# EAGLE board A6ECU-5 (EAGLE 7.5.0)
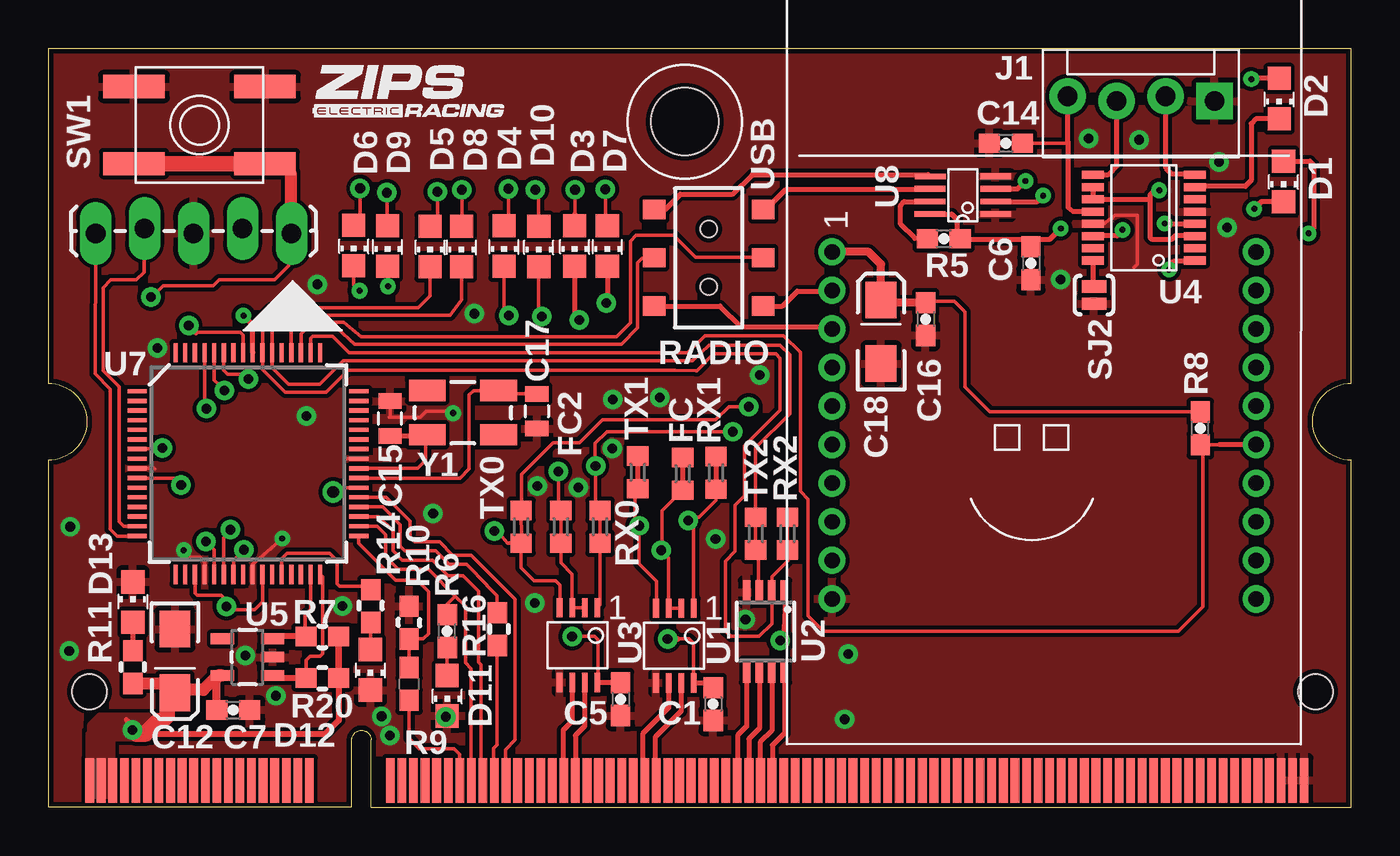
[diagram p0: board, top side]
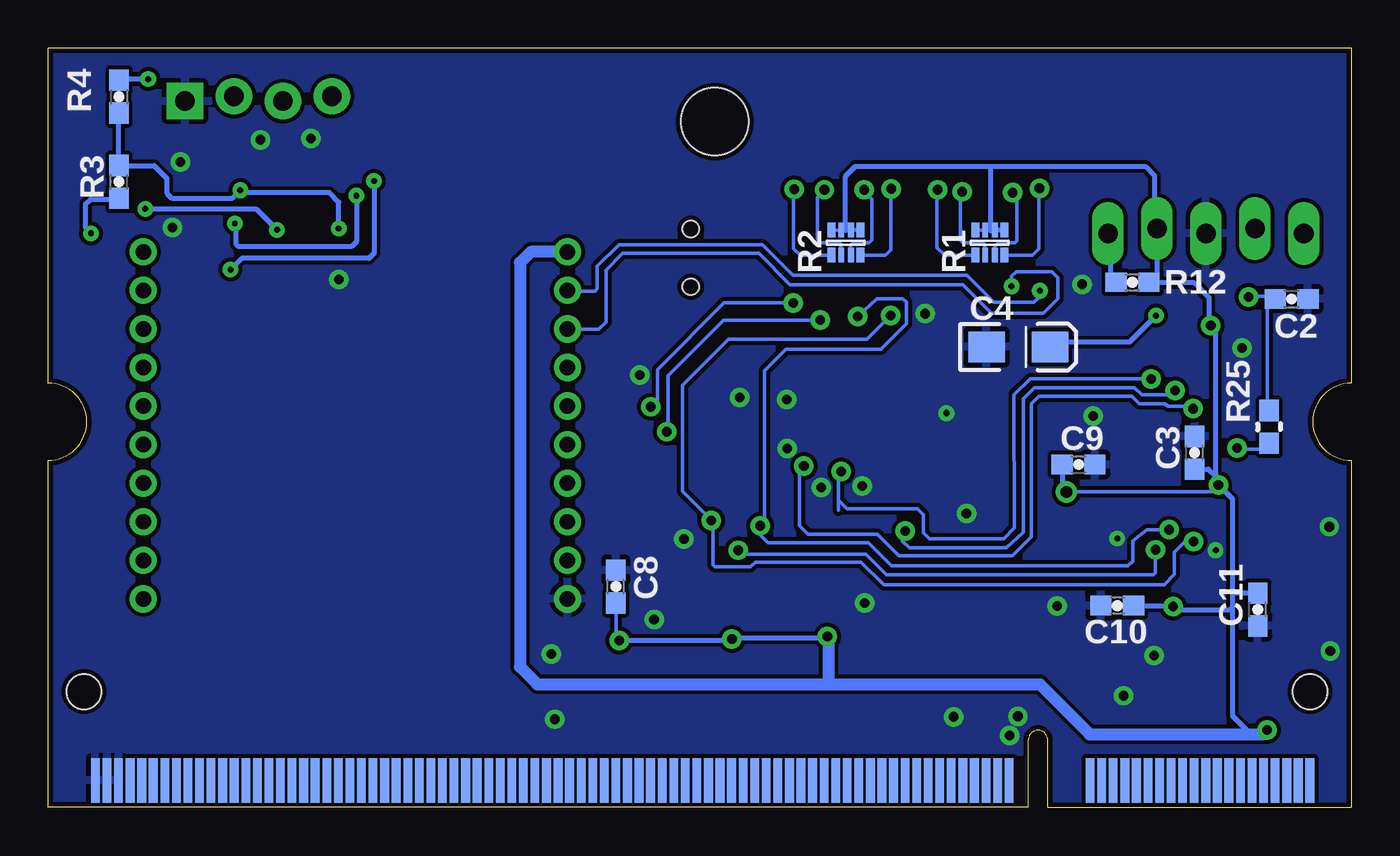
[diagram p1: board, bottom side, seen from below]

Size 67.6 x 39.37 mm. Coordinates in mm from the lower left corner, seen from the top.
Copper layers (1*16): Top 0.035mm / dielectric 1.5mm / Bottom 0.035mm
Design rules "SparkFun": minimum track width 8mil, minimum drill 20mil, track to track 8mil, track to pad 8mil, pad to pad 8mil, via to via 8mil, smd to smd 8mil, copper to edge 10mil, drill to drill 8mil, minimum pad ring 12mil, minimum via ring 10mil, stop-mask expansion 4mil, vias tented up to drill 25mil, thermal gap 10mil

## Footprints (pad centres in the part's own frame; a part is rotated, then mirrored left to right if it is on the bottom)
0603 = smd 1.1 x 1: 1 -0.85,0; 2 0.85,0
EIA3216-16V = smd 1.9 x 1.6: A 1.65,0; C -1.65,0
0805 = smd 0.8 x 1.2: 1 -0.9,0; 2 0.9,0
CHIP_LED0805 = smd 1.2 x 1.2: A 0,-1.05; C 0,1.05
R0603 = smd 1 x 1.1: 1 -0.85,0; 2 0.85,0
1X05_LOCK_LONGPADS = drill 1.016 long: 1 0,0; 2 2.54,-0.254; 3 5.08,0; 4 7.62,-0.254; 5 10.16,0
MOLEX_1X4 = drill 1.016 pad 1.88 square: 1 -3.81,0.127 | drill 1.016 pad 1.88: 2 -1.27,-0.127; 3 1.27,0.127; 4 3.81,-0.127
MNR14 = smd 0.4 x 0.75: 1 -0.75,-0.65; 4 0.75,-0.65; 5 0.75,0.65; 8 -0.75,0.65 | smd 0.3 x 0.75: 2 -0.25,-0.65; 3 0.25,-0.65; 6 0.25,0.65; 7 -0.25,0.65
AYZ0202 = smd 1 x 1.15: 1 -2.5,2.825; 2 0,2.825; 3 2.5,2.825; 4 -2.5,-2.825; 5 0,-2.825; 6 2.5,-2.825 | hole 0.85: 1.5,0; -1.5,0
PAD-JUMPER-2-NO_YES_SILK = smd 0.635 x 1.27: 1 -0.45,0; 2 0.45,0
EVQ-Q2 = smd 3.2 x 1.2: A -3.4,-2; A' 3.4,-2; B -3.4,2; B' 3.4,2
MSOP-8 = smd 0.3 x 1: 1 -0.975,-1.95; 2 -0.325,-1.95; 3 0.325,-1.95; 4 0.975,-1.95; 5 0.975,1.925; 6 0.325,1.925; 7 -0.325,1.925; 8 -0.975,1.925
MSOP8 = smd 0.4 x 1.2: 1 -0.975,-2.05; 2 -0.325,-2.05; 3 0.325,-2.05; 4 0.975,-2.05; 5 0.975,2.05; 6 0.325,2.05; 7 -0.325,2.05; 8 -0.975,2.05
SSOP-16 = smd 0.419 x 1.143: 1 -2.223,-2.642; 2 -1.587,-2.642; 3 -0.953,-2.642; 4 -0.318,-2.642; 5 0.318,-2.642; 6 0.953,-2.642; 7 1.587,-2.642; 8 2.223,-2.642; 9 2.223,2.642; 10 1.587,2.642; 11 0.953,2.642; 12 0.318,2.642; 13 -0.318,2.642; 14 -0.953,2.642; 15 -1.587,2.642; 16 -2.223,2.642
SOT23-5 = smd 0.55 x 1.2: 1 -0.95,-1.3; 2 0,-1.3; 3 0.95,-1.3; 4 0.95,1.3; 5 -0.95,1.3
RM024-TH = drill 0.8: 1 9,11; 2 7,11; 3 5,11; 4 3,11; 5 1,11; 6 -1,11; 7 -3,11; 8 -5,11; 9 -7,11; 10 -9,11; 11 -9,-11; 12 -7,-11; 13 -5,-11; 14 -3,-11; 15 -1,-11; 16 1,-11; 17 3,-11; 18 5,-11; 19 7,-11; 20 9,-11
TQFP-64 = smd 0.22 x 1: 1 -3.75,-5.75; 2 -3.25,-5.75; 3 -2.75,-5.75; 4 -2.25,-5.75; 5 -1.75,-5.75; 6 -1.25,-5.75; 7 -0.75,-5.75; 8 -0.25,-5.75; 9 0.25,-5.75; 10 0.75,-5.75; 11 1.25,-5.75; 12 1.75,-5.75; 13 2.25,-5.75; 14 2.75,-5.75; 15 3.25,-5.75; 16 3.75,-5.75; 33 3.75,5.75; 34 3.25,5.75; 35 2.75,5.75; 36 2.25,5.75; 37 1.75,5.75; 38 1.25,5.75; 39 0.75,5.75; 40 0.25,5.75; 41 -0.25,5.75; 42 -0.75,5.75; 43 -1.25,5.75; 44 -1.75,5.75; 45 -2.25,5.75; 46 -2.75,5.75; 47 -3.25,5.75; 48 -3.75,5.75 | smd 1 x 0.22: 17 5.75,-3.75; 18 5.75,-3.25; 19 5.75,-2.75; 20 5.75,-2.25; 21 5.75,-1.75; 22 5.75,-1.25; 23 5.75,-0.75; 24 5.75,-0.25; 25 5.75,0.25; 26 5.75,0.75; 27 5.75,1.25; 28 5.75,1.75; 29 5.75,2.25; 30 5.75,2.75; 31 5.75,3.25; 32 5.75,3.75; 49 -5.75,3.75; 50 -5.75,3.25; 51 -5.75,2.75; 52 -5.75,2.25; 53 -5.75,1.75; 54 -5.75,1.25; 55 -5.75,0.75; 56 -5.75,0.25; 57 -5.75,-0.25; 58 -5.75,-0.75; 59 -5.75,-1.25; 60 -5.75,-1.75; 61 -5.75,-2.25; 62 -5.75,-2.75; 63 -5.75,-3.25; 64 -5.75,-3.75
VFSOP-8 = smd 0.3 x 1.6: 1 -0.98,-1.7; 2 -0.33,-1.7; 3 0.33,-1.7; 4 0.98,-1.7; 5 0.97,1.69; 6 0.325,1.7; 7 -0.33,1.7; 8 -0.98,1.71
SLOT-1376408-1_1.8V = smd 0.45 x 2.3: 1 2.15,1.4; 3 2.75,1.4; 5 3.35,1.4; 7 3.95,1.4; 9 4.55,1.4; 11 5.15,1.4; 13 5.75,1.4; 15 6.35,1.4; 17 6.95,1.4; 19 7.55,1.4; 21 8.15,1.4; 23 8.75,1.4; 25 9.35,1.4; 27 9.95,1.4; 29 10.55,1.4; 31 11.15,1.4; 33 11.75,1.4; 35 12.35,1.4; 37 12.95,1.4; 39 13.55,1.4; 41 17.75,1.4; 43 18.35,1.4; 45 18.95,1.4; 47 19.55,1.4; 49 20.15,1.4; 51 20.75,1.4; 53 21.35,1.4; 55 21.95,1.4; 57 22.55,1.4; 59 23.15,1.4; 61 23.75,1.4; 63 24.35,1.4; 65 24.95,1.4; 67 25.55,1.4; 69 26.15,1.4; 71 26.75,1.4; 73 27.35,1.4; 75 27.95,1.4; 77 28.55,1.4; 79 29.15,1.4; 81 29.75,1.4; 83 30.35,1.4; 85 30.95,1.4; 87 31.55,1.4; 89 32.15,1.4; 91 32.75,1.4; 93 33.35,1.4; 95 33.95,1.4; 97 34.55,1.4; 99 35.15,1.4; 101 35.75,1.4; 103 36.35,1.4; 105 36.95,1.4; 107 37.55,1.4; 109 38.15,1.4; 111 38.75,1.4; 113 39.35,1.4; 115 39.95,1.4; 117 40.55,1.4; 119 41.15,1.4; 121 41.75,1.4; 123 42.35,1.4; 125 42.95,1.4; 127 43.55,1.4; 129 44.15,1.4; 131 44.75,1.4; 133 45.35,1.4; 135 45.95,1.4; 137 46.55,1.4; 139 47.15,1.4; 141 47.75,1.4; 143 48.35,1.4; 145 48.95,1.4; 147 49.55,1.4; 149 50.15,1.4; 151 50.75,1.4; 153 51.35,1.4; 155 51.95,1.4; 157 52.55,1.4; 159 53.15,1.4; 161 53.75,1.4; 163 54.35,1.4; 165 54.95,1.4; 167 55.55,1.4; 169 56.15,1.4; 171 56.75,1.4; 173 57.35,1.4; 175 57.95,1.4; 177 58.55,1.4; 179 59.15,1.4; 181 59.75,1.4; 183 60.35,1.4; 185 60.95,1.4; 187 61.55,1.4; 189 62.15,1.4; 191 62.75,1.4; 193 63.35,1.4; 195 63.95,1.4; 197 64.55,1.4; 199 65.15,1.4 | smd 0.45 x 2.3 bottom: 2 2.15,1.4; 4 2.75,1.4; 6 3.35,1.4; 8 3.95,1.4; 10 4.55,1.4; 12 5.15,1.4; 14 5.75,1.4; 16 6.35,1.4; 18 6.95,1.4; 20 7.55,1.4; 22 8.15,1.4; 24 8.75,1.4; 26 9.35,1.4; 28 9.95,1.4; 30 10.55,1.4; 32 11.15,1.4; 34 11.75,1.4; 36 12.35,1.4; 38 12.95,1.4; 40 13.55,1.4; 42 17.75,1.4; 44 18.35,1.4; 46 18.95,1.4; 48 19.55,1.4; 50 20.15,1.4; 52 20.75,1.4; 54 21.35,1.4; 56 21.95,1.4; 58 22.55,1.4; 60 23.15,1.4; 62 23.75,1.4; 64 24.35,1.4; 66 24.95,1.4; 68 25.55,1.4; 70 26.15,1.4; 72 26.75,1.4; 74 27.35,1.4; 76 27.95,1.4; 78 28.55,1.4; 80 29.15,1.4; 82 29.75,1.4; 84 30.35,1.4; 86 30.95,1.4; 88 31.55,1.4; 90 32.15,1.4; 92 32.75,1.4; 94 33.35,1.4; 96 33.95,1.4; 98 34.55,1.4; 100 35.15,1.4; 102 35.75,1.4; 104 36.35,1.4; 106 36.95,1.4; 108 37.55,1.4; 110 38.15,1.4; 112 38.75,1.4; 114 39.35,1.4; 116 39.95,1.4; 118 40.55,1.4; 120 41.15,1.4; 122 41.75,1.4; 124 42.35,1.4; 126 42.95,1.4; 128 43.55,1.4; 130 44.15,1.4; 132 44.75,1.4; 134 45.35,1.4; 136 45.95,1.4; 138 46.55,1.4; 140 47.15,1.4; 142 47.75,1.4; 144 48.35,1.4; 146 48.95,1.4; 148 49.55,1.4; 150 50.15,1.4; 152 50.75,1.4; 154 51.35,1.4; 156 51.95,1.4; 158 52.55,1.4; 160 53.15,1.4; 162 53.75,1.4; 164 54.35,1.4; 166 54.95,1.4; 168 55.55,1.4; 170 56.15,1.4; 172 56.75,1.4; 174 57.35,1.4; 176 57.95,1.4; 178 58.55,1.4; 180 59.15,1.4; 182 59.75,1.4; 184 60.35,1.4; 186 60.95,1.4; 188 61.55,1.4; 190 62.15,1.4; 192 62.75,1.4; 194 63.35,1.4; 196 63.95,1.4; 198 64.55,1.4; 200 65.15,1.4 | hole 1.8: 2.15,6; 65.75,6 | hole 3.5: 33.02,35.56
CRYSTAL-SMD-5X3 = smd 1.9 x 1.1: 1 -1.85,-1.15; 2 1.85,-1.15; 3 1.85,1.15; 4 -1.85,1.15

## Placement (x,y rotation side)
C1  0.1UF  [0603]  34.49,5.36 270 top
C2  0.1UF  [0603]  3.1,26.37 0 bottom
C3  0.1UF  [0603]  8.13,18.39 90 bottom
C4  10UF  [EIA3216-16V]  17.27,23.88 0 bottom
C5  0.1UF  [0603]  29.69,5.61 270 top
C6  0.1UF  [0603]  50.98,28.22 270 top
C7  0.1UF  [0603]  9.6,5.05 0 top
C8  0.1UF  [0603]  38.15,11.46 90 bottom
C9  0.1UF  [0603]  14.15,17.78 0 bottom
C10  0.1UF  [0603]  12.14,10.46 180 bottom
C11  0.1UF  [0603]  4.85,10.26 90 bottom
C12  10UF  [EIA3216-16V]  6.58,7.59 270 top
C14  0.1UF  [0603]  49.68,34.44 180 top
C15  12PF  [0805]  17.73,20.17 90 top
C16  0.1UF  [0603]  45.52,25.32 270 top
C17  12PF  [0805]  25.35,20.55 270 top
C18  10UF  [EIA3216-16V]  43.21,24.66 90 top
D1  RED  [CHIP_LED0805]  64.08,32.46 180 top
D2  GREEN  [CHIP_LED0805]  63.86,36.75 180 top
D3  RED  [CHIP_LED0805]  27.3,29.11 180 top
D4  RED  [CHIP_LED0805]  23.65,29.11 180 top
D5  RED  [CHIP_LED0805]  19.81,29.08 180 top
D6  RED  [CHIP_LED0805]  15.85,29.13 180 top
D7  GREEN  [CHIP_LED0805]  29.01,29.11 180 top
D8  GREEN  [CHIP_LED0805]  21.44,29.08 180 top
D9  GREEN  [CHIP_LED0805]  17.6,29.11 180 top
D10  GREEN  [CHIP_LED0805]  25.45,29.08 180 top
D11  ORANGE  [CHIP_LED0805]  20.7,5.79 180 top
D12  AMBER  [CHIP_LED0805]  16.71,7.14 180 top
D13  GREEN  [CHIP_LED0805]  4.39,10.64 0 top
FC  TESTPOINT  [R0603]  32.92,17.3 90 top
FC2  TESTPOINT  [R0603]  26.59,14.55 90 top
ICSP  ICSP  [1X05_LOCK_LONGPADS]  12.62,29.77 180 top
J1  M4_1X4_LOCK  [MOLEX_1X4]  56.69,36.75 180 top
R1  RN-4_1K  [MNR14]  18.75,29.29 0 bottom
R2  RN-4_1K  [MNR14]  26.21,29.29 0 bottom
R3  1K  [0603]  63.93,32.44 90 bottom
R4  1K  [0603]  63.93,36.86 270 bottom
R5  1K  [0603]  46.46,29.49 0 top
R6  1K  [0603]  20.7,9.14 90 top
R7  2k  [0603]  14.22,8.86 0 top
R8  1K  [0603]  59.77,19.66 90 top
R9  30k  [0603]  18.72,6.4 270 top
R10  10k  [0603]  18.72,9.59 270 top
R11  499  [0603]  4.39,7.28 270 top
R12  10K  [0603]  11.35,27.23 0 bottom
R14  499  [0603]  16.74,10.44 90 top
R16  1k  [0603]  23.29,9.25 90 top
R20  2k  [0603]  14.22,6.71 0 top
R25  499  [0603]  4.27,19.74 270 bottom
RX0  TESTPOINT  [R0603]  28.63,14.55 90 top
RX1  TESTPOINT  [R0603]  34.65,17.35 90 top
RX2  TESTPOINT  [R0603]  38.35,14.2 90 top
S1  DPDT  [AYZ0202]  34.26,28.5 270 top
SJ2  [PAD-JUMPER-2-NO_YES_SILK]  54.25,26.57 90 top
SW1  SPST_TACT-EVQQ2  [EVQ-Q2]  7.85,35.38 180 top
TX0  TESTPOINT  [R0603]  24.54,14.55 90 top
TX1  TESTPOINT  [R0603]  30.58,17.37 90 top
TX2  TESTPOINT  [R0603]  36.7,14.2 90 top
U1  SN75HVD08DRMSOP  [MSOP-8]  32.51,8.38 180 top
U2  ISL83077MSOP  [MSOP8]  37.21,9.12 180 top
U3  SN75HVD08DRMSOP  [MSOP-8]  27.51,8.41 180 top
U4  FT230X  [SSOP-16]  56.85,30.58 90 top
U5  24LC00T-I/OT  [SOT23-5]  10.34,7.8 90 top
U6  RM024  [RM024-TH]  51.66,19.81 90 top
U7  DSPIC33EP256GM306  [TQFP-64]  10.36,17.83 270 top
U8  SN74LVC2G241  [VFSOP-8]  47.45,31.75 90 top
U$1  INDPK1  [PICKIT-PIN-1]  12.67,27.29 180 top
U$2  LOGO16-2-M  [2016-2-LOGO-M]  13.61,35.74 0 top
X1  1376408-SLOT_1.8V  [SLOT-1376408-1_1.8V]  0,0 0 top
Y1  12Mhz  [CRYSTAL-SMD-5X3]  21.51,20.47 180 top

## Library data of the parts
C1-C3 C5-C11 C14 C16 = FSAE Electric; PARTNO: CC0603ZRY5V9BB104
C4 C12 C18 = FSAE Electric; PARTNO: T491A106M016AT
C15 C17 = FSAE Electric; PARTNO: CL21C120JBANNNC
D1 D3-D6 = FSAE Electric; PARTNO: LH R974-LP-1
D2 D7-D10 D13 = FSAE Electric; PARTNO: LTST-S220GKT
D11 = FSAE Electric; PARTNO: LTST-C170KFKT
D12 = FSAE Electric; PARTNO: HSMA-C170
FC FC2 RX0 RX1 RX2 TX1 TX2 = DFT2
ICSP = SparkFun-Connectors
J1 = FSAE Electric; PARTNO: 0022232041
R1 R2 = FSAE Eletric; PARTNO: MNR14ERAPJ102
R3-R6 R8 = FSAE Electric; PARTNO: RC0603JR-071KL
R7 R20 = FSAE Eletric; PARTNO: ERJ-3EKF2001V
R9 = FSAE Eletric; PARTNO: RC0603FR-0730KL
R10 = FSAE Eletric; PARTNO: RC0603FR-0710KL
R11 R14 R25 = FSAE Eletric; PARTNO: RC0603FR-07499RL
R12 = FSAE Electric; PARTNO: RC0603FR-0710KL
R16 = FSAE Eletric; PARTNO: RC0603JR-071KL
S1 = SparkFun-Electromechanical; PARTNO: AYZ0202AGRLC; PROD_ID: SWCH-08179
SJ2 = SparkFun-Passives
SW1 = adafruit; PARTNO: EVQ-Q2F03W
TX0 = DFT2; PARTNO: 1625854-3
U1 U3 = FSAE Electric; PARTNO: ISL83072EIUZA-T
U2 = NASA_LIB; PARTNO: ISL83072EIUZA-T
U4 = FSAE Electric; PARTNO: FT230XS-R
U5 = FSAE Eletric; PARTNO: 24LC00T-I/OT
U6 U$1 = FSAE Eletric
U7 = FSAE Electric; PARTNO: DSPIC33EP256GM306-I/PT
U8 = FSAE Electric; PARTNO: SN74LVC2G241DCUR
U$2 = Pic
X1 = con-amp
Y1 = SparkFun-FreqCtrl

## Nets
3V: C6.1 R3.2 R4.2 R5.2 U4.3 U4.10 U4.11 U8.8
+3V3: C1.1 C3.1 C5.1 C7.1 C8.1 C9.1 C10.1 C11.2 C12.A C16.1 C18.A ICSP.2 R1.5 R1.6 R1.7 R1.8 R2.5 R2.6 R2.7 R2.8 R7.2 R8.2 R11.2 R12.2 R20.2 U1.8 U2.1 U3.8 U5.5 U6.1 U7.10 U7.19 U7.26 U7.38 U7.57 X1.1 X1.3 X1.5
BRAKELIGHT: U7.35 X1.57
ECU-SS-IN: R9.2 X1.53
GND: C1.2 C2.2 C3.2 C4.C C5.2 C6.2 C7.2 C8.2 C9.2 C10.2 C11.1 C12.C C14.2 C15.2 C16.2 C17.2 C18.C D11.C D12.C D13.C ICSP.3 J1.1 R10.1 SJ2.1 SW1.A SW1.A' U1.5 U2.4 U3.5 U4.5 U4.13 U5.2 U6.10 U7.9 U7.20 U7.25 U7.41 U8.1 U8.4 X1.195 X1.196 X1.197 X1.198 X1.199 X1.200
HORN: R16.1 X1.59
HORNEN: U7.37 X1.61
INRG: R8.1 U6.15 U7.50
N$1: D7.A R2.1
N$2: R14.2 U7.28
N$3: D13.A R11.1
N$4: D2.A R4.1
N$5: D3.A R2.2
N$6: D4.A R2.4
N$7: D10.A R2.3
N$8: D8.A R1.1
N$9: D5.A R1.2
N$10: D6.A R1.4
N$11: D9.A R1.3
N$12: D11.A R6.1
N$13: C15.1 U7.40 Y1.3
N$14: C17.1 U7.39 Y1.1
N$15: D12.A R14.1
N$16: R7.1 U5.3 U7.31
N$17: SJ2.2 U4.16
N$18: D1.A R3.1
N$19: D2.C U4.7
N$20: D1.C U4.14
N$21: U4.4 U8.2
N$22: C2.1 ICSP.1 R12.1 R25.1 SW1.B SW1.B'
N$27: U4.1 U8.3
N$28: J1.3 U4.9
N$32: R20.1 U5.1 U7.32
N$54: J1.2 U4.8
N$69: R5.1 U8.7
N$85: C14.1 J1.4 U4.12
N$87: R25.2 U7.7
N$88: C4.A U7.56
N$90: ICSP.4 U7.15
N$91: ICSP.5 U7.16
RS485-1-A: U3.6 X1.71
RS485-1-B: U3.7 X1.73
RS485-2-A: U1.6 X1.85
RS485-2-B: U1.7 X1.87
RS-TM-A: U2.8 X1.107
RS-TM-B: U2.7 X1.105
RS-TM-Y: U2.5 X1.101
RS-TM-Z: U2.6 X1.103
RTD-HORN: R16.2 U7.36
RX: S1.2 U7.52
RXD0: D3.C RX0.1 RX0.2 U3.1 U7.61
RXD1: D4.C RX1.1 RX1.2 U1.1 U7.21
RXD2: D5.C RX2.1 RX2.2 U2.2 U7.55
RXD3: S1.1 U8.6
RXD4: D6.C S1.3 U6.2
SS-D: R9.1 R10.2 U7.33
SS-ECU-RELAY: R6.2 U7.34 X1.55
TX: S1.5 U7.51
TXD0: D7.C TX0.1 TX0.2 U3.4 U7.60
TXD1: D10.C TX1.1 TX1.2 U1.4 U7.22
TXD2: D8.C TX2.1 TX2.2 U2.3 U7.54
TXD3: S1.4 U8.5
TXD4: D9.C S1.6 U6.3
U1-EN: FC.1 FC.2 U1.2 U1.3 U7.23
U3-EN: FC2.1 FC2.2 U3.2 U3.3 U7.59

## Tracks (layer width: path | path; a pad name or v marks a point on that pad's centre or on a via)
3V  (via drill 0.3)
  Top 0.178: C6.1 50.98,29.46
  Top 0.254: U8.8 46.88,30.77 47.14,30.5 47.14,29.67 | 47.14,29.67 47.14,29.65 R5.2 | v57.63,32 57.4,32 57.15,31.75 57.15,31.57 | 57.15,31.57 57.15,29.57 57.25,29.46 58.29,29.46 58.5,29.67 59.45,29.67 U4.3 | U4.10 U4.11 57.11,31.53 57.15,31.57 | 47.14,29.67 47.35,29.46 50.98,29.46 51.97,29.46 v52.53,30.02
  Bottom 0.254: R4.2 R3.2 62.09,33.29 61.44,32.64 61.44,31.85 61.19,31.6 58.04,31.6 v57.63,32 57.51,31.88 53.01,31.88 52.53,31.39 v52.53,30.02
+3V3  (via drill 0.5, 0.6)
  Top 0.178: v27.18,8.87 28.35,8.87 28.52,8.69 28.52,6.52 U3.8 | v6.9,16.73 6.54,17.08 U7.10 | U7.57 10.11,24.48 9.96,24.64 7.7,24.64 7.67,24.61 | U7.26 11.11,10.66 10.72,10.26 9.4,10.26 v9.25,10.41 9.25,10.72 8.97,11 7.72,11 7.62,11.1 U7.19 | U7.38 15.01,16.58 v14.78,16.36 | R8.2 48.86,20.51 47.55,21.82 47.55,25.7 47.02,26.24 45.58,26.24 C16.1 | 32.64,8.74 33.25,8.74 33.48,8.51 33.48,6.47 U1.8 | U2.1 38.19,10.05 38.23,10.01
  Top 0.254: v37.97,8.66 38.2,8.97 38.23,10.01 | 7.67,24.61 v7.29,24.99 | v4.37,4.01 4.37,4.24 4.06,4.55 | U1.8 34.25,6.46 C1.1 | C5.1 28.5,6.46 U3.8
  Top 0.305: R20.2 R7.2 15.07,4.51 14.35,3.79 5.21,3.79 | v32.13,8.74 32.64,8.74
  Top 0.406: C16.1 43.34,26.17 C18.A 43.2,28.17 42.56,28.81 U6.1 | C7.1 8.75,6.56 U5.5
  Top 0.61: R11.2 6.18,6.43 6.18,6.35 C12.A 6.73,6.1 8.05,6.1 8.8,6.85 U5.5 | 40.72,28.75 U6.1
  Top 0.813: 6.18,6.43 6.18,4.75 5.92,4.5 5.71,4.5 5,3.79 4.6,3.79 v4.37,4.01
  Bottom 0.178: R1.5 R1.6 R1.7 R1.8 | R2.5 R2.6 R2.7 R2.8 | R2.5 25.67,29.94 25.7,29.97 25.7,29.95 25.68,29.92 | R2.5 26.22,29.94 26.24,29.92 | 9.4,10.26 v9.25,10.41 | v6.9,16.73 6.9,17.18 7.06,17.35 | 6.58,17.04 v6.9,16.73 | v14.78,16.36 7.26,16.36 v6.9,16.73 | C8.1 38.15,8.84 v37.97,8.66
  Bottom 0.254: v37.97,8.66 32.21,8.66 v32.13,8.74 | 32.08,8.79 27.25,8.79 v27.18,8.87 | 26.24,29.92 26.24,32.74 25.73,33.25 18.69,33.25 | 18.69,33.25 10.69,33.25 10.21,32.77 10.21,30.15 ICSP.2 10.08,27.31 10.43,27.31 R12.2 10.48,27.2 8.15,27.2 7.39,26.44 7.39,25.09 v7.29,24.99 7.06,24.77 7.06,17.35 7.06,17.2 | R1.5 18.73,29.94 18.69,29.9 18.69,33.25 | 7.06,17.2 7.06,16.89 v6.9,16.73 6.17,16 6.17,11.28 | 6.17,11.28 6.17,10.36 | 6.17,10.36 6.17,4.75 5.21,3.79 | 5.21,3.79 4.6,3.79 | 7.52,3.79 5.21,3.79 | 9.4,10.26 6.27,10.26 6.17,10.36 | C11.2 6.01,11.11 6.17,11.28 | C10.1 9.3,10.46 v9.25,10.41 | C3.1 7.41,17.54 7.06,17.2 | C9.1 15,16.57 v14.78,16.36
  Bottom 0.305: 27.13,8.91 v27.18,8.87 | 32.08,8.79 v32.13,8.74
  Bottom 0.61: U6.1 42.56,28.81 43.13,28.25 43.13,7.29 42.22,6.38 27.15,6.38 | 27.15,6.38 16.15,6.38 13.56,3.79 4.6,3.79 v4.37,4.01 | 27.13,8.91 27.13,6.4 27.15,6.38
  pour Top (no thermals): 2.08,0.56 2.08,3.86 3.35,3.86 3.35,0.56
  pour Top: 2.16,3.78 2.16,4.29 2.67,4.8 5.21,4.8 5.21,3.53 2.41,3.53
BRAKELIGHT
  Top 0.178: X1.57 22.45,1.5 22.45,7.39 22.33,7.52 22.33,11.2 21.51,12.01 20.75,12.01 19.94,12.83 18.36,12.83 17.88,13.31 17.88,14.35 17.15,15.08 U7.35
ECU-SS-IN
  Top 0.178: R9.2 18.72,3.58 19.25,3.05 21.06,3.05 21.34,2.77 21.34,1.41 X1.53
GND  (via drill 0.3, 0.33, 0.5)
  Top 0.178: U7.41 15.42,18.08 15.42,18.09 | U7.9 5.51,17.58 5.54,17.55 | U7.20 8.11,12.74 7.87,12.98 7.39,12.98 v7.04,13.34 | U7.25 10.61,12.62 v12.14,13.95 | U4.13 54.8,30.26 55.04,30.5 55.14,30.5 55.35,30.71 56.49,30.71 56.49,28.17 56.31,27.99 | C15.2 17.73,20.3 17.68,20.24 19.3,20.24 19.61,20.55 20.9,20.55 v21.01,20.45
  other vias: 10.24,7.87 1.14,14.55 17.3,4.72 19.96,15.24 13.39,20.29 5.66,23.83 41.33,4.57 41.5,7.95 29.29,21.16 20.62,4.7 15.27,10.44 11.81,5.79 17.73,3.73 1.09,8.1 31.72,21.26 36.91,22.43 25.37,16.66 27.51,16.59 29.26,18.62 56.59,34.62 53.98,34.7 52.53,27.38 61.16,30.07 60.73,33.48 34.62,13.92 36.17,9.75 13.97,27.13 22.1,25.6 25.25,10.59
  pour Top (rank 4): 67.89,-1.52 67.94,41.4 -1.12,41.38 -0.91,-1.6
  pour Bottom (rank 4): 68.45,-0.71 68.83,40.54 -2.41,40.03 -2.31,-1.03
HORN
  Top 0.178: R16.1 23.29,3.25 23.11,3.07 23.11,1.44 X1.59
HORNEN
  Top 0.178: X1.61 23.72,1.43 23.72,3 24.23,3.5 24.23,10.79 21.95,13.08 20.98,13.08 20.3,13.77 19,13.77 18.77,13.99 18.77,14.83 17.52,16.08 U7.37
INRG
  Top 0.178: 60.75,18.81 R8.1 59.89,18.68 59.89,10.41 58.62,9.14 40.21,9.14 39.42,9.93 39.42,15.98 39.01,16.38 39.01,23.6 38.15,24.46 34.06,24.46 33.17,23.57 15.62,23.57 14.76,24.43 13.72,24.43 13.61,24.33 U7.50
  Top 0.254: U6.15 60.75,18.81
N$1  (via drill 0.5)
  Top 0.178: v28.91,32.05 28.91,30.59
  Top 0.254: 28.91,30.59 28.91,30.26 D7.A
  Bottom 0.178: R2.1 28.59,28.64 28.93,28.98 28.93,32.03 v28.91,32.05
N$2
  Top 0.178: R14.2 16.79,11.18 16.48,11.48 15.11,11.48 14.99,11.61 14.99,12.8 14.61,13.18 12.39,13.18 12.12,12.9 U7.28
N$3
  Top 0.254: D13.A R11.1
N$4  (via drill 0.3)
  Top 0.254: D2.A 62.44,37.8 v62.41,37.77
  Bottom 0.254: v62.41,37.77 63.87,37.77 R4.1
N$5  (via drill 0.5)
  Top 0.178: v27.33,32.03 27.33,30.77
  Top 0.254: 27.33,30.77 27.33,30.18 D3.A
  Bottom 0.178: R2.2 26.46,29.21 26.54,29.29 27.53,29.29 27.69,29.44 27.69,31.65 27.41,31.93 27.41,31.95 v27.33,32.03
N$6  (via drill 0.5)
  Top 0.178: v23.88,32.08 23.88,30.39 D4.A
  Bottom 0.178: R2.4 24.17,28.64 23.88,28.93 v23.88,32.08
N$7  (via drill 0.5)
  Top 0.178: 25.29,32.02 v25.27,32.03 25.45,31.85 D10.A
  Bottom 0.178: v25.27,32.03 25.27,31.95 24.87,31.55 24.87,29.44 25.02,29.29 25.86,29.29 25.98,29.16 25.98,28.66 R2.3
N$8  (via drill 0.5)
  Top 0.178: v21.46,32.03 21.46,30.16 D8.A
  Bottom 0.178: R1.1 21.09,28.64 21.49,29.03 21.49,32 v21.46,32.03
N$9  (via drill 0.5)
  Top 0.178: v20.19,31.93 20.19,30.51 D5.A
  Bottom 0.178: R1.2 19,29.18 19.1,29.29 20.14,29.29 20.27,29.41 20.27,31.85 v20.19,31.93
N$10  (via drill 0.5)
  Top 0.178: v16.18,32.11 16.18,30.46 16.2,30.44 16.2,30.18 D6.A
  Bottom 0.178: R1.4 16.55,28.64 16.2,28.98 16.2,32.08 v16.18,32.11
N$11  (via drill 0.5)
  Top 0.178: v17.58,31.88 17.58,30.47
  Top 0.61: 17.58,30.47 17.58,30.18 D9.A
  Bottom 0.178: R1.3 18.5,29.1 18.31,29.29 17.45,29.29 17.35,29.39 17.35,31.65 v17.58,31.88
N$12
  Top 0.178: R6.1 D11.A
N$13
  Top 0.178: 19.61,19.26 Y1.3 19.58,19.24 19.58,18.01 19.16,17.58 U7.40
  Top 0.254: C15.1 19.66,19.27 Y1.3
N$14
  Top 0.178: U7.39 21.37,17.08 21.84,17.55 21.84,21.39 22.07,21.61 Y1.1 23.53,21.45 C17.1
N$15
  Top 0.178: R14.1 16.74,8.21 D12.A
N$16
  Top 0.178: R7.1 13.34,8.9 13.34,10.01 13.61,10.29 U7.31
  Top 0.305: R7.1 11.76,8.87 U5.3
N$17
  Top 0.254: U4.16 54.2,27.07 SJ2.2
N$18  (via drill 0.3)
  Top 0.254: D1.A 65.45,33.51 65.66,33.3 65.66,30.05 v65.38,29.77
  Bottom 0.254: v65.38,29.77 65.38,29.79 65.66,30.07 65.66,31.29 65.41,31.55 63.97,31.55 R3.1
N$19
  Top 0.254: D2.C 62.65,35.7 62.41,35.46 62.41,32.51 62.1,32.21 59.52,32.21 U4.7
N$20  (via drill 0.3)
  Top 0.254: D1.C 62.93,31.41 v62.56,31.04 | v55.73,29.95 55.73,29.92 55.45,29.64 54.22,29.64 U4.14
  Bottom 0.254: v62.56,31.04 56.82,31.04 v55.73,29.95
N$21  (via drill 0.3)
  Top 0.254: U8.2 51.31,31.42 v51.61,31.73 | v57.91,30.28 59.47,30.28 U4.4
  Bottom 0.254: v51.61,31.73 51.61,29.34 51.87,29.08 57.73,29.08 57.86,29.21 57.86,30.23 v57.91,30.28
N$22  (via drill 0.5)
  Top 0.178: v5.33,26.47 5.38,26.47 5.97,27.05 8.56,27.05 8.87,27.36 11.73,27.36 12.47,28.09 12.47,29.62 ICSP.1
  Top 0.61: SW1.B 12.11,33.38 12.57,32.92 12.57,29.82 ICSP.1
  Top 0.813: SW1.B' SW1.B
  Bottom 0.178: 5.28,26.52 4.52,26.52 4.37,26.36 4.37,20.69 R25.1 4.3,20.59 4.34,20.62
  Bottom 0.254: 5.28,26.52 v5.33,26.47 | C2.1 4.37,26.36 | R12.1 12.2,27.27 12.29,27.36 12.32,27.36 12.47,27.51 12.47,29.62 ICSP.1
N$27  (via drill 0.3)
  Top 0.254: U8.3 50.29,32.08 v50.7,32.49 | v58.14,27.89 58.14,28.09 58.4,28.35 59.47,28.35 U4.1
  Bottom 0.254: v50.7,32.49 50.7,28.73 50.95,28.47 57.56,28.47 v58.14,27.89
N$28
  Top 0.254: U4.9 54.22,32.79 54.97,32.79 55.45,33.27 55.45,36.6 J1.3
N$32
  Top 0.178: R20.1 13.37,7.63 13.59,7.85 14.1,7.85 14.22,7.98 14.22,11.97 U7.32
  Top 0.305: R20.1 11.78,6.71 U5.1
N$54
  Top 0.254: U4.8 59.42,32.87 58.27,32.87 57.99,33.15 57.99,36.85 J1.2
N$69
  Top 0.254: R5.1 44.96,29.52 44.22,30.25 44.22,31.19 44.4,31.42 45.72,31.42 U8.7
N$85
  Top 0.178: C14.1 52.83,34.44 52.91,34.52
  Top 0.254: U4.12 54.06,30.91 53.16,30.91 52.91,31.11 52.91,34.52 52.91,36.85 J1.4
N$87  (via drill 0.5)
  Top 0.178: v5.92,18.64 5.87,18.59 4.62,18.59 U7.7
  Bottom 0.178: R25.2 4.31,18.89 U7.7 5.86,18.58 v5.92,18.64
N$88  (via drill 0.3)
  Top 0.254: U7.56 10.61,25.02 v10.13,25.5
  Bottom 0.254: v10.13,25.5 11.51,24.13 15.62,24.13 C4.A
N$90
  Top 0.178: ICSP.4 4.98,27.76 4.57,27.36 3.25,27.36 2.85,26.95 2.85,22.66 3.68,21.82 3.68,14.81 3.91,14.58 U7.15
N$91
  Top 0.178: ICSP.5 2.44,22.48 3.23,21.69 3.23,14.43 3.58,14.07 U7.16
RS485-1-A
  Top 0.254: X1.71 26.72,1.43 26.72,4.01 27.18,4.48 U3.6
RS485-1-B
  Top 0.254: X1.73 27.36,3.73 27.83,4.21 U3.7
RS485-2-A
  Top 0.254: X1.85 30.86,1.49 30.86,3.83 32.19,5.16 U1.6
RS485-2-B
  Top 0.254: X1.87 31.5,1.45 31.5,3.66 32.84,5 U1.7
RS-TM-A
  Top 0.254: U2.8 38.19,3.85 37.57,3.23 37.57,1.42 X1.107
RS-TM-B
  Top 0.254: U2.7 37.54,3.98 36.93,3.38 36.93,1.42 X1.105
RS-TM-Y
  Top 0.254: U2.5 36.24,4.21 35.76,3.73 35.76,1.41 X1.101
RS-TM-Z
  Top 0.254: U2.6 36.89,4.09 36.35,3.56 X1.103
RTD-HORN
  Top 0.178: R16.2 23.29,10.97 22.76,11.51 22.76,11.53 21.69,12.6 20.8,12.6 20.09,13.31 18.49,13.31 18.26,13.54 18.26,14.66 17.34,15.58 U7.36
RX
  Top 0.178: S1.2 37.06,28.52 33.58,28.52 32.44,29.67 30.5,29.67 30.2,29.36 30.2,25.12 29.49,24.41 16.23,24.41 15.32,25.17 13.06,25.17 12.61,24.73 U7.52
RXD0  (via drill 0.5)
  Top 0.178: 8.11,21.1 v8.2,20.68 8.11,20.77 U7.61 | 27.55,25.29 v27.56,25.27 | v35.51,19.48 28.98,19.48 28.37,18.87 28.37,17.73 v28.4,17.7 28.4,15.63 RX0.2 RX0.1 28.63,10.5 U3.1
  Top 0.254: D3.C 27.3,25.53 v27.56,25.27
  Bottom 0.178: v8.2,20.68 8.31,20.8 9.5,20.8 9.7,20.93 11,20.93 11.38,21.31 16.2,21.31 16.59,20.93 16.59,14.05 17.58,13.06 23.47,13.06 24.59,14.17 28.19,14.17 28.63,14.61 28.63,17.48 v28.4,17.7 | v27.56,25.27 32.56,25.27 35.46,22.38 35.46,19.53 v35.51,19.48
RXD1  (via drill 0.5)
  Top 0.178: RX1.1 34.65,15.93 33.76,15.04 33.35,15.04 v33.2,14.88 | 33.11,14.79 v33.2,14.88 | v8.18,13.79 8.61,13.36 U7.21 | D4.C 23.65,25.76 23.89,25.52 v23.9,25.5 | U1.1 33.49,14.6 v33.2,14.88
  Top 0.254: RX1.2 RX1.1
  Bottom 0.178: v33.2,14.88 33.2,15.01 | v8.18,13.79 8.61,13.79 9.17,13.23 9.17,12.09 9.7,11.56 24.26,11.56 25.43,12.72 30.91,12.72 31.17,12.47 33,12.47 33.11,12.57 33.11,14.79 v33.2,14.88 | v23.9,25.5 25.12,24.28 32.31,24.28 34.7,21.89 34.7,16.38 v33.2,14.88
RXD2
  Top 0.178: 11.12,23.59 11.12,22.71 12.29,21.54 14.43,21.54 15.57,22.68 32.51,22.66 33.6,22.66 33.66,22.66 34.52,23.52 37.74,23.52 37.97,23.29 37.97,20.6 36.12,18.75 36.12,16.15 35.64,15.67 35.64,13.28 35.13,12.78 35.13,9.14 35.41,8.87 36.88,8.87 37.54,9.52 U2.2 | RX2.2 RX2.1 38.38,13.32 38.38,12.8 37.54,11.96 U2.2 | 37.52,11.15 U2.2 | D5.C 19.81,26.54 19.18,25.91 11.53,25.91 11.12,25.5 11.12,23.59 | 11.12,23.59 U7.55
RXD3
  Top 0.254: S1.1 37.22,31 38.28,32.05 45.73,32.05 U8.6
RXD4  (via drill 0.3)
  Top 0.178: D6.C 15.85,27.1 v16.15,26.8
  Top 0.254: S1.3 38.09,26 38.86,26.77 40.62,26.77 U6.2
  Bottom 0.178: U6.2 40.62,26.77 39.24,26.77 39.12,26.9 39.12,28.07 38,29.18 30.56,29.18 28.96,27.58 19.94,27.58 18.54,26.19 16.46,26.19 16.15,26.49 v16.15,26.8
SS-D
  Top 0.178: R9.1 R10.2 19.46,8.74 19.74,9.02 19.74,11.18 19.13,11.79 18.03,11.79 16.11,13.71 U7.33
SS-ECU-RELAY
  Top 0.178: X1.55 21.95,7.18 21.64,7.49 21.64,10.44 21.12,10.96 | U7.34 17.07,14.58 17.5,14.15 17.5,13.01 18.16,12.34 19.74,12.34 21.12,10.96 | R6.2 20.7,10.54 21.12,10.96
TX
  Top 0.178: S1.5 31.41,28.47 30.81,28.47 30.58,28.25 30.58,24.87 29.74,24.03 15.9,24.03 14.99,24.84 13.41,24.84 13.11,24.57 U7.51
TXD0  (via drill 0.5)
  Top 0.178: v9.14,21.61 9.07,21.74 8.61,22.15 U7.60 | 24.52,13.72 TX0.1 | v23.14,14.33 23.3,14.33 23.82,13.71 | 23.82,13.71 TX0.1 | 23.82,13.71 24.56,13.87 TX0.2 24.56,15.43 24.56,17.27 26.19,18.9 27.56,18.9 28.75,20.09 34.62,20.09 35.31,20.78 v36.35,20.78 | 28.98,26.18 v28.96,26.16 | TX0.1 24.54,12.42 25.2,11.76 26.31,11.76 26.54,11.53 26.54,10.37 U3.4
  Top 0.254: D7.C 29.01,26.21 v28.96,26.16
  Bottom 0.178: v9.14,21.61 9.45,21.41 10.87,21.41 11.25,21.77 16.43,21.77 17.02,21.18 17.02,14.28 17.88,13.46 22.91,13.46 23.29,13.79 23.29,14.17 v23.14,14.33 | v28.96,26.16 32.54,26.16 35.99,22.71 35.99,21.13 v36.35,20.78
TXD1  (via drill 0.5)
  Top 0.178: 9.37,14.3 9.11,13.99 U7.22 | 9.42,14.35 9.37,14.3 | 9.37,14.3 v9.45,14.4 | v30.66,14.61 30.66,12.62 31.55,11.73 31.55,10.34 U1.4 | 30.48,14.78 v30.66,14.61 | 25.32,25.74 v25.6,25.45 25.45,25.6 D10.C | TX1.1 30.53,16.28 30.45,16.2 30.45,14.81 v30.66,14.61
  Top 0.254: TX1.2 TX1.1
  Bottom 0.178: v9.45,14.4 10.62,14.4 11.33,13.82 11.33,12.78 11.58,12.52 23.85,12.52 25.04,13.72 30.25,13.72 30.66,14.12 v30.66,14.61 30.45,14.81 30.45,22.63 29.34,23.75 24.41,23.75 23.09,25.07 23.09,26.21 23.29,26.39 24.61,26.39 25.6,25.48 v25.6,25.45
TXD2
  Top 0.178: U2.3 36.85,11.2 36.85,12.98 36.7,13.13 TX2.1 TX2.2 36.7,18.64 38.48,20.42 38.48,23.47 37.97,23.98 34.29,23.98 33.43,23.16 15.29,23.16 14.07,21.95 12.47,21.95 11.61,22.8 U7.54 11.61,25.17 11.96,25.53 20.85,25.53 21.44,26.31 D8.C
TXD3
  Top 0.254: S1.4 31.99,31 32.79,31.8 35.51,31.8 36.52,32.82 45.66,32.82 U8.5
TXD4  (via drill 0.3)
  Top 0.178: 17.62,27.22 v17.63,27.03 D9.C
  Top 0.254: S1.6 34.86,26 35.94,24.92 40.52,24.92 U6.3
  Bottom 0.178: 40.53,24.94 U6.3 40.64,24.79 39.04,24.79 38.66,25.17 38.66,27.86 37.8,28.73 30.73,28.73 29.11,27.1 20.14,27.1 18.67,25.63 15.98,25.63 15.21,26.39 15.21,27.46 15.54,27.79 17.37,27.79 17.63,27.53 v17.63,27.03
U1-EN  (via drill 0.5)
  Top 0.178: v10.16,13.36 9.61,12.81 U7.23 | FC.1 32.59,16.13 31.85,15.39 31.85,13.39 v31.8,13.34 32.19,12.95 U1.3 U1.2
  Top 0.254: FC.2 FC.1
  Bottom 0.178: v10.16,13.36 10.16,12.17 10.26,12.06 24.11,12.06 25.17,13.13 31.6,13.13 v31.8,13.34
U3-EN  (via drill 0.5)
  Top 0.178: v10.39,22.23 10.16,22.45 9.32,22.45 9.11,22.66 U7.59 | v26.47,17.42 26.47,15.53 FC2.2 FC2.1 26.59,12.68 27.18,12.09 U3.3 U3.2
  Bottom 0.178: v10.39,22.23 16.64,22.23 17.5,21.41 17.48,14.5 18.03,13.95 21.89,13.95 22.2,14.25 22.2,15.19 22.5,15.49 26.16,15.49 26.59,15.93 | FC2.2 26.59,15.93 | 26.59,15.93 26.59,17.3 v26.47,17.42

## Text on the board
tPlace: USB | RADIO